# Altium PCB correctCore.PcbDoc (part 2 of 2)
Units mil, origin at the board's own origin, x right, y up, seen from the top; angles counter-clockwise.
Board outline 4175 x 4095 mil, 4 copper layers (Top Layer, GND, PWR, Bottom Layer), stack 43.711 mil thick; 90 components, 157 nets, 637 pads, 408 vias.
Unrouted connection lines stored in the file: 2.
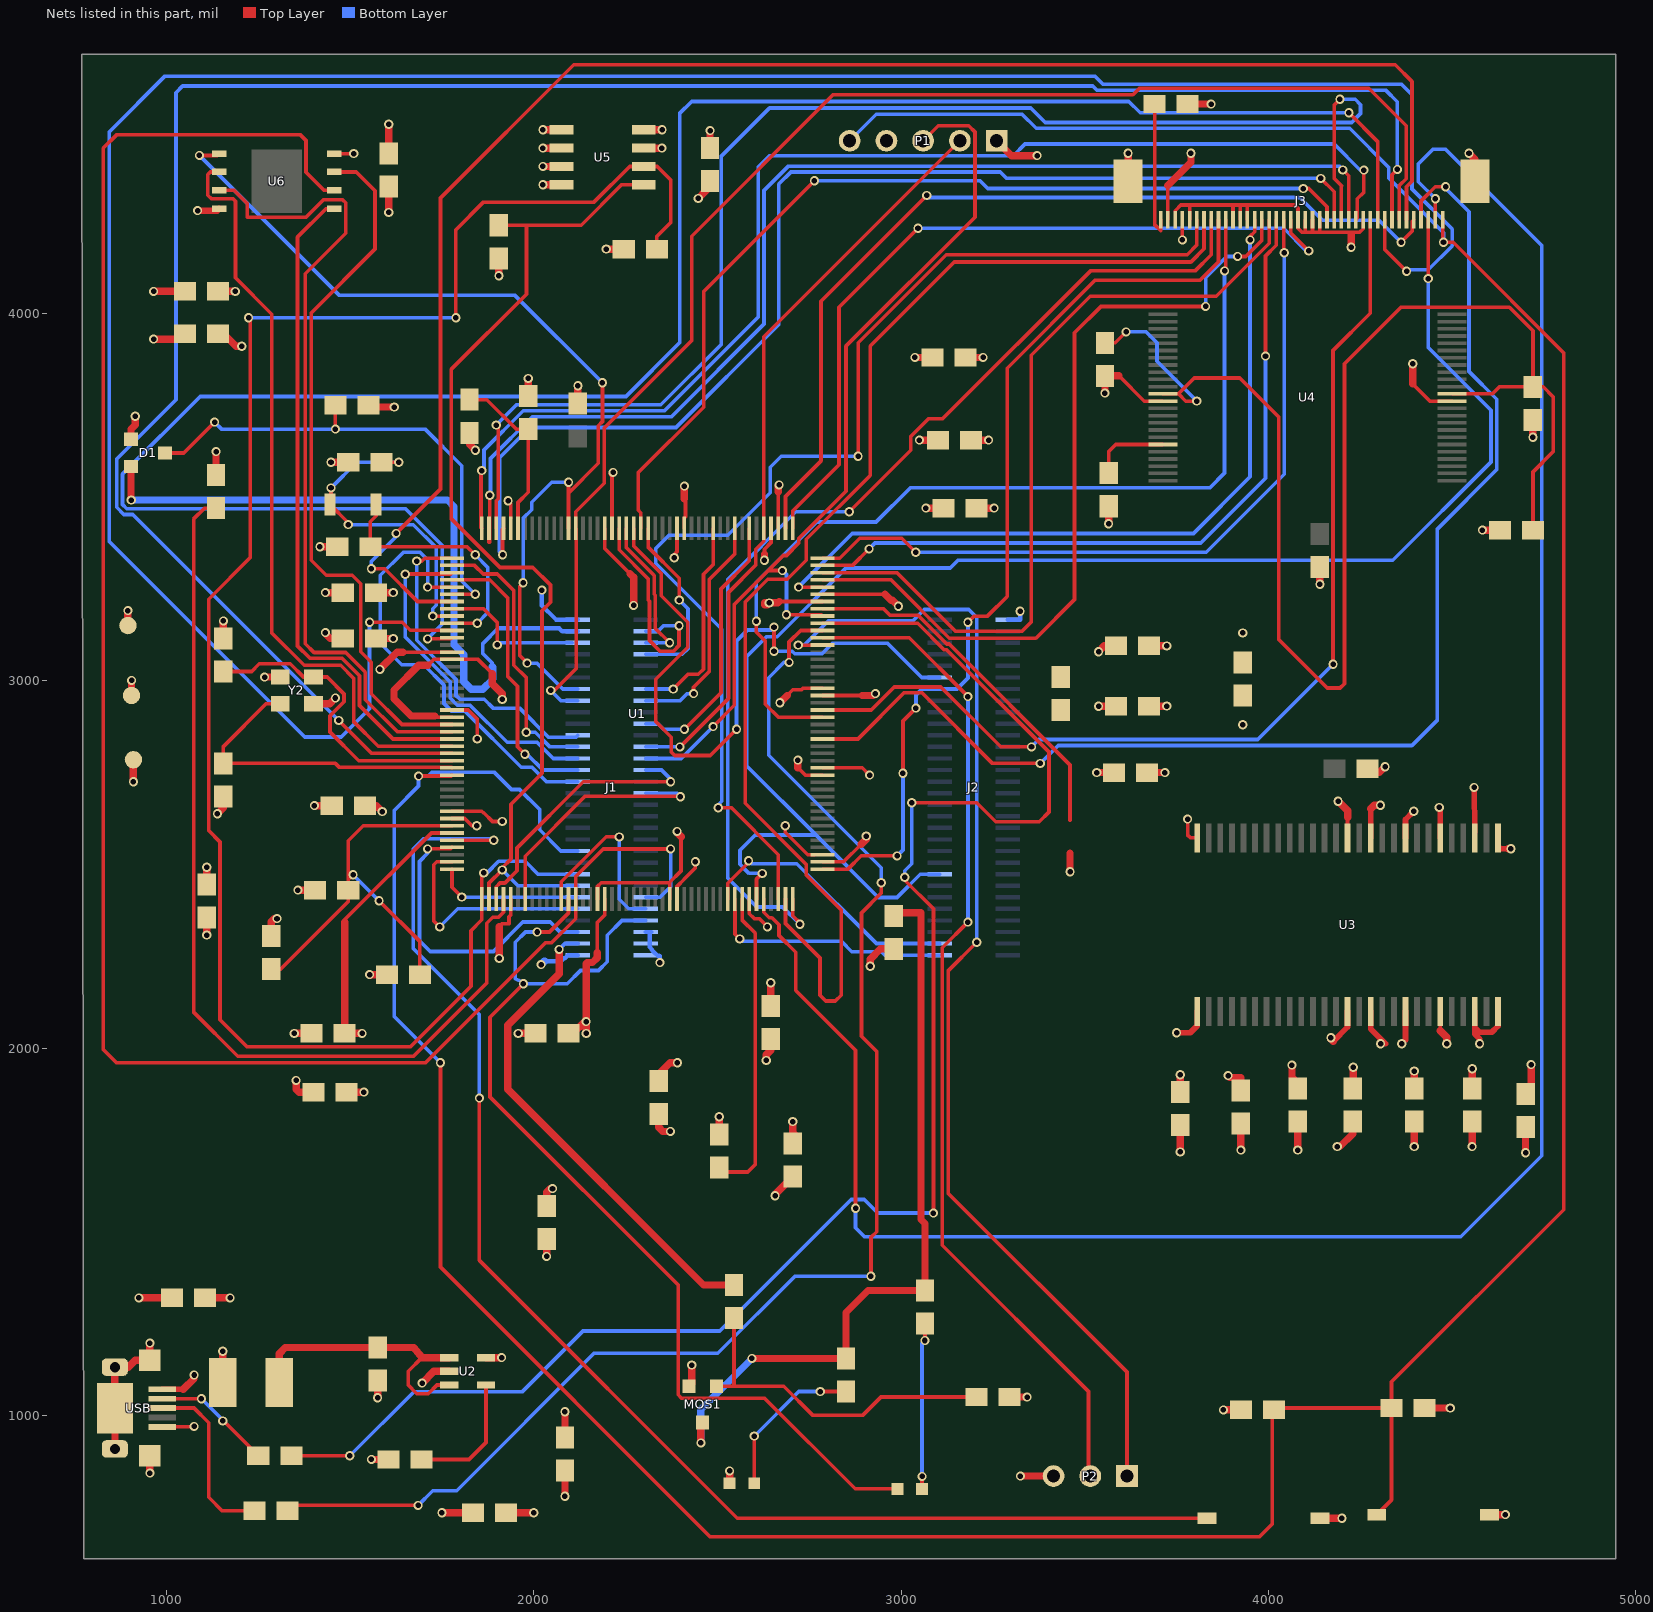
[diagram p4: the nets of this part, all layers, seen from the top]

## Via types
v1: diameter 25, hole 15, Top Layer to Bottom Layer, tented both sides, 408 vias

## Nets (pads, with @x,y where several pads share a name; then routed paths per layer and width w, separated by ;. In a path a pad name is that pad's centre, name@x,y a point inside that pad or via, vN(x,y) a via of type N, cw(c..) or ccw(c..) an arc to the next point about the centre after c; other vN are vias at no path point) (continued)
GND: C1.2 C2.1 C3.2 C4.1 C5.2 C6.1 C7.1 C8.1 C9.1 C10.1 C11.1 C12.2 C13.1 C14.1 C15.1 C16.1 C17.1 C18.1 C19.1 C20.1 C21.1 C22.1 C23.1 C24.1 C25.1 C26.1 C27.1 C28.1 C29.1 C30.1 C31.1 C32.1 C33.2 C34.2 C35.1 C36.1 C37.1 C38.1 C39.1 C40.1 C41.1 C42.1 C43.1 C44.2 C45.2 GND.1 J1.1 J1.30 J2.31 J3.3 J3.4 J3.5 J3.11 J3.12 J3.13 J3.20 J3.21 J3.22 J3.23 J3.29 J3.A J3.B P1.1 P2.3 PWR.2 R1.2 R4.2 R7.2 R14.1 RST.2 U1.14 U1.22 U1.37 U1.61 U1.71 U1.90 U1.102 U1.113 U1.126 U1.135 U1.148 U1.158 U2.2 U3.6 U3.12 U3.28 U3.41 U3.46 U3.52 U3.54 U4.13 U4.36 U5.1 U5.2 U5.3 U5.4 U5.7 U6.4 USB.5 USB.6 USB.7 USB.8 USB.9 Y2.2 Y2.4 | length 8486.9
  Top Layer w9.84: 3593.26,3830 3662,3761.26 U4.13@3712.6,3761.26 ; 3745.98,4279.76 3761.22,4295 3903.46,4295 ; v1(3765.67,4200) J3.4@3765.67,4232 ; J3.5@3785.35,4255 3785.35,4295 ; J3.11@3903.46,4255 3903.46,4295 ; J3.12@3923.15,4255 3923.15,4295 ; J3.13@3942.83,4255 3942.83,4295 ; J3.21@4100.32,4255 4100.32,4220.46 ; J3.22@4120,4255 4120,4220.46 ; J3.23@4139.69,4255 4139.69,4220.46 ; J3.29@4257.8,4255 4257.8,4230.7 4247.56,4220.46 4139.69,4220.46 ; 4393,3808 4439.74,3761.26 U4.36@4500,3761.26 ; 3903.46,4295 3923.15,4295 ; 3923.15,4295 3942.83,4295 ; 3942.83,4295 4072,4295 4080.63,4286.37 J3.20@4080.63,4255 4080.63,4231.99 4092.16,4220.46 4100.32,4220.46 ; 4100.32,4220.46 4120,4220.46 ; 4120,4220.46 4139.69,4220.46
  Top Layer w10: USB.5@989,968.82 v1@1074.01,968.82 ; 1643.78,3077.78 U1.14@1777.18,3077.78 ; U1.37@1777.18,2625.02 1811.98,2625.02 1831.66,2605.34 v1(1845,2605.34) ; U1.22@1777.18,2920.3 1821.74,2920.3 1846,2896.03 v1(1846,2841.56) ; U1.61@2173.46,2405.91 2173.46,2440 2183.46,2450 2369,2450 2401,2482 2401,2575 ; U1.158@2212.83,3415 v1@2212.83,3563.83 ; U1.71@2370.31,2405.91 2370.31,2450 ; U1.148@2409.68,3415 2409.68,3443 2413,3446.32 2413,3490 ; U1.135@2665.59,3415 2665.59,3514.59 ; 2668.04,3215.57 U1.126@2786.28,3215.57 ; 2719,2763 2738.87,2743.13 U1.102@2786.28,2743.13 ; U1.90@2786.28,2506.91 2843.16,2506.91 2891.25,2555 ; U1.113@2786.28,2959.67 2894.67,2959.67
  Top Layer w15.75: v1(3750,2041.62) 3787,2041.62 3806.02,2060.64 U3.28@3806.02,2100 ; v1@4176.87,2018.87 4215.47,2057.47 U3.41@4215.47,2100 ; U3.12@4278.46,2572.44 4278.46,2651.46 ; v1(4363,2012) 4372.95,2021.95 U3.46@4372.95,2100 ; v1(4465,2655) 4467.44,2652.56 U3.6@4467.44,2572.44 ; U3.52@4561.93,2100 4561.93,2056 ; v1(4575,2012) 4575,2024.93 4561.93,2038 4561.93,2056 ; U3.54@4624.92,2100 4624.92,2059.92 4608,2043 4574.93,2043 4561.93,2056
  Top Layer w17.72: v1(1085,4280) 1138.5,4280 U6.4@1143.5,4285
  Top Layer w20: USB.7@859.65,908.78 860,908.78 USB.9@860,1020 860,1085 859.65,1085.35 USB.6@859.65,1131.22 896,1131.22 914.78,1150 USB.9@955,1150 v1(955,1197) ; GND.1@905,2960 v1(905,3001) ; v1(925,1320) C33.2@1015,1320 ; v1(955,843) USB.8@955,890 ; v1@1074.01,968.82 v1(1075.19,970) ; R1.2@1135,3560 v1(1135,3624) ; v1(1139,2638) 1155.06,2654.06 C10.1@1155.06,2685 ; C11.1@1155,3115 v1(1155,3163) ; v1(1267,3010) Y2.4@1310,3010 ; v1(1348,2040) C7.1@1395,2040 ; v1(1353,1912) 1353,1888 1361,1880 C6.1@1400,1880 ; v1(1358,2430) C2.1@1405,2430 ; Y2.2@1400.55,2937.17 1444.17,2937.17 v1(1460,2953) ; v1(1403,2660) C15.1@1450,2660 ; v1(1418,3365) C9.1@1465,3365 ; v1(1433,3131) 1433,3128 1446.06,3114.94 C14.1@1480,3114.94 ; v1(1433,3240) C13.1@1480,3240 ; v1(1448,3595) C8.1@1495,3595 ; C1.2@1550,3750 1555,3745 v1(1620,3745) ; v1(1553,2200) C4.1@1600,2200 ; v1(1558,880) C30.1@1605,880 ; v1(1575,1048) C29.1@1575,1095 ; v1(1581,3031) 1627.78,3077.78 1643.78,3077.78 ; v1(1605,4275) C44.2@1605,4345 ; v1(1696,1088) 1728,1120 U2.2@1770,1120 ; v1@1753,735 C31.1@1815,735 ; v1(1958,2040) 2005,2040 C16.1@2005,2039.94 ; R4.2@1985,3775 v1(1985,3823) ; v1(2025,4350) U5.4@2075,4350 ; v1(2025,4400) U5.3@2075,4400 ; v1(2025,4450) U5.2@2075,4450 ; v1(2025,4500) U5.1@2075,4500 ; v1(2035,1433) C27.1@2035,1480 ; C32.1@2085,940 v1(2085,1010) ; R7.2@2120,3755 v1(2120,3803) ; v1@2212.83,3563.83 v1(2216,3567) ; U5.7@2299.41,4450 v1(2349,4450) ; C17.1@2340,1820 2340,1784 2351,1773 v1(2372,1773) ; v1(2390,2590) 2390,2586.57 2401.57,2575 ; 2410,3495.73 v1(2410,3530) ; v1(2448,4313) 2470,4335 2470,4360 C45.2@2479.94,4360 ; C3.2@2505,1765 v1(2505,1813) ; v1(2533,849) 2533.07,848.93 PWR.2@2533.07,815 ; v1(2633,1966.5) 2633,1982 2645,1994 C18.1@2645,2025 ; v1(2657,1598) 2657,1602 C19.1@2705,1650 ; 2665.59,3514.59 2665.59,3530.59 v1(2668,3533) ; 2668.04,3215.57 2664.46,3212 v1(2641,3212) ; 2719,2763 v1(2719,2784) ; 2891.25,2555 2905,2568.75 v1(2905,2577.2) ; 2894.67,2959.67 2924.67,2959.67 v1(2930,2965) ; v1(2916,2223) 2916,2242 2944,2270 C34.2@2980,2270 ; C25.1@3175,3880.06 3222.94,3880.06 v1(3223,3880) ; C24.1@3190,3655 v1(3238,3655) ; C23.1@3205,3470 v1(3253,3470) ; P1.1@3260,4470 3300.53,4429.47 v1(3370,4429.47) ; R14.1@3295,1050 v1(3343,1050) ; v1(3325,835) P2.3@3415,835 ; v1(3460,2480) 3460,2530 ; v1(3555,3783) C36.1@3555,3830 3593.26,3830 ; J3.A@3618.03,4359.43 v1(3618,4436) ; C21.1@3670,2750 v1(3718,2750) ; C20.1@3675,2930.58 3722.58,2930.58 v1(3723,2931) ; C22.1@3675,3095 v1(3723,3095) ; v1(3760,1717.11) 3760,1790 C37.1@3760.06,1790 ; C28.1@3780,4570.06 3827.94,4570.06 3828,4570 v1(3844,4570) ; v1(3925,1722.5) C38.1@3925,1795 ; v1(4080,1722.5) C39.1@4080,1800 ; v1(4170,2028) 4170,2025.75 v1@4176.87,2018.87 ; v1(4187.19,1731.88) 4194.88,1731.88 4230,1767 C40.1@4230,1800 ; v1(4225,4180) 4225,4215.38 ; 4278.46,2651.46 4288,2661 v1(4305,2661) ; 4393,3808 v1(4393,3863) ; v1(4396.97,1731.88) C41.1@4396.97,1800 ; C12.2@4425,1020 v1(4495,1020) ; v1(4546,4436) 4561.91,4420.09 J3.B@4561.91,4359.43 ; v1(4554.45,1731.88) 4554.45,1799.55 4554,1800 C42.1@4554.45,1800 ; RST.2@4602.09,730 v1(4645,730) ; v1(4700,1715) C43.1@4700,1785 ; v1(4720,3663) C35.1@4720,3710 ; v1(2641,3212) 2628.64,3212 2628.64,3206.5 2635.5,3206.5 v1(2641,3212)
  Bottom Layer w11.81: v1(2022,3247) 2022,3205 2060.61,3166.39 J1.30@2119.96,3166.39 ; 2030,2236.09 2073.68,2236.09 2081.68,2244.09 2084.5,2244.09 2093.41,2253 J1.1@2119.96,2253 ; J2.31@3290,3166.39 3324,3166.39 v1(3324,3189)
  Bottom Layer w20: v1(2020,2227.19) 2028.9,2236.09 2030,2236.09
  other v1: 1750,735 3930,2880
IIC_SCL: J1.8 R20.1 U1.45 U5.6 | length 5040.8
  Top Layer w10: v1(1223.5,3988) 1228.5,3983 1228.5,3335.5 1115,3222 1115,2592 1146,2561 1146,2077 1219,2004 1665,2004 1829,2168 1829,2319.5 1858.5,2349 U1.45@1858.5,2405.91 1858.5,2471.37 v1(1864.06,2476.92) ; v1(1788,3988) 1788,4228 1863,4303 2164,4303 2261,4400 U5.6@2299.41,4400 2336,4400 2373,4363 2373,4247.37 2335,4209.37 R20.1@2335,4175.06
  Bottom Layer w10: v1(1223.5,3988) v1(1788,3988) ; v1(1864.06,2476.92) 1872.69,2476.92 1904.27,2508.5 1976.5,2508.5 2011.53,2473.47 J1.8@2119.96,2473.47
IIC_SDA: J1.7 R21.1 U1.46 U5.5 | length 2816.5
  Top Layer w10: U1.46@1878.19,2405.91 1878.19,2449.19 v1(1914,2485) 1914,2491 1938,2515 1938,2664 2022.5,2748.5 2022.5,3190.5 2045.5,3213.5 2045.5,3260.5 1997.5,3308.5 1908.23,3308.5 1775,3441.73 1775,3847 1980,4052 1980,4240 ; R21.1@1904.94,4240 1980,4240 ; U5.5@2299.41,4350 2239,4350 2129,4240 1980,4240
  Bottom Layer w10: v1(1914,2485) 1957.02,2441.98 J1.7@2119.96,2441.98
JTCK: J1.42 P1.2 U1.137 | length 2058.7
  Top Layer w10: v1(2398,2819.93) 2530,2951.93 2530,3240.42 2604.5,3314.92 2604.5,3357.72 2626.22,3379.44 U1.137@2626.22,3415 2626.22,3936.22 P1.2@3160,4470
  Bottom Layer w10: J1.42@2305,2819.93 v1(2398,2819.93)
JTMS: J1.43 P1.3 U1.124 | length 2566.6
  Top Layer w10: v1(2488,2875) 2546,2933 2546,3207.63 2638.37,3300 ; v1(2677,3300) 2638.37,3300 ; v1(2687.93,3179.5) 2782.98,3179.5 U1.124@2786.28,3176.2 ; P1.3@3060,4470 3101,4511 3184,4511 3201,4494 3201,4262 2850,3911 2850,3515.63 2721,3386.63 2721,3374 2688,3341 2679.37,3341 2638.37,3300
  Bottom Layer w10: J1.43@2305,2788.43 2401.43,2788.43 v1(2488,2875) ; v1(2677,3300) 2687.93,3289.07 v1(2687.93,3179.5)
KEY0: J1.6 U1.44 | length 403.5
  Top Layer w10: U1.44@1777.18,2487.23 1777.18,2437.82 v1(1804,2411)
  Bottom Layer w10: v1(1804,2411) 1819.48,2411 1820,2410.48 J1.6@2119.96,2410.48
KEY1: J1.5 U1.43 | length 624.3
  Top Layer w10: v1(1744,2330) 1728,2346 1728,2498.91 1736,2506.91 U1.43@1777.18,2506.91
  Bottom Layer w10: v1(1744,2330) 1792.98,2378.98 J1.5@2119.96,2378.98
KEY2: J1.28 U1.8 | length 406.4
  Top Layer w10: U1.8@1777.18,3195.89 1863.21,3195.89 1900.41,3158.69 v1(1900.41,3097.46)
  Bottom Layer w10: v1(1900.41,3097.46) 1906.35,3103.4 J1.28@2104.54,3103.4
LCD_B3: J3.24 U1.154 | length 2607.6
  Top Layer w9.84: v1(4095,4340) 4109.87,4340 4159.37,4290.5 J3.24@4159.37,4255
  Top Layer w10: U1.154@2291.57,3415 2291.57,3457.43 2284.5,3464.5 2284.5,3566.84 2462.5,3744.84 2462.5,4059.5 v1(2764,4361)
  Bottom Layer w10: v1(2764,4361) 3215,4361 3236,4340 v1(4095,4340)
LCD_B4: J3.25 U1.173 | length 3257.7
  Top Layer w9.84: J3.25@4179.06,4255 4179.06,4331
  Top Layer w10: v1(1915,3343) 1915,3412.44 U1.173@1917.56,3415 ; v1(4142.56,4367.5) 4179.06,4331
  Bottom Layer w10: v1(1915,3343) 1906.5,3351.5 1906.5,3606.74 1989.32,3689.55 2387.11,3689.55 2667,3969.45 2667,4352 2700,4385 3270,4385 3287.5,4367.5 v1(4142.56,4367.5)
LCD_B5: J3.26 U1.174 | length 3751.2
  Top Layer w9.84: J3.26@4198.74,4255 4198.74,4347.34
  Top Layer w10: U1.174@1897.87,3415 1897.87,3489.64 1903.5,3495.27 1903.5,3690.5 v1(1898,3696) ; v1(4194.71,4583) 4178.93,4567.21 4178.93,4367.15 4198.74,4347.34
  Bottom Layer w10: v1(1898,3696) 1953,3751 2346,3751 2510,3915 2510,4427 2642,4559 3353,4559 3392.25,4519.75 4226.5,4519.75 4250.75,4544 4250.75,4568.25 4236,4583 v1(4194.71,4583)
LCD_B6: J3.27 U1.175 | length 3277.2
  Top Layer w9.84: J3.27@4218.43,4255 4218.43,4374.57
  Top Layer w10: U1.175@1878.19,3415 1878.19,3377.52 1880,3377.52 v1(1880,3505) ; v1(4202.43,4390.57) 4218.43,4374.57
  Bottom Layer w10: v1(1880,3505) 1882,3507 1882,3604.87 1996.13,3719 2375,3719 2627,3971 2627,4334.63 2693.37,4401 4192,4401 v1(4202.43,4390.57)
LCD_B7: J3.28 U1.176 | length 3370.8
  Top Layer w9.84: J3.28@4238.11,4255 4241.95,4258.84 4241.95,4311.95 4260,4330 v1(4260,4390)
  Top Layer w10: U1.176@1858.5,3415 1856.5,3417 1856.5,3570 v1(1858.5,3572)
  Bottom Layer w10: v1(1858.5,3572) 1864.5,3578 1864.5,3628.47 1971.03,3735 2355.69,3735 2611,3990.31 2611,4399 2641.47,4429.47 3305.47,4429.47 3337,4461 4179,4461 4250,4390 v1(4260,4390)
LCD_BL: J1.23 J3.34 U1.163 | length 3905.6
  Top Layer w9.84: J3.34@4356.22,4255 4356.22,4347.94
  Top Layer w10: v1(2046,2973.5) 2055.72,2973.5 2115.39,3033.17 2115.39,3414.02 U1.163@2114.41,3415 2114.41,3460 2191.83,3537.43 2191.83,3687.83 2430,3926 2430,4210.37 2814.63,4595 3631,4595 3649,4613 4273,4613 4375,4511 4375,4366.72 4356.22,4347.94
  Bottom Layer w10: v1(2046,2973.5) 2073.58,2945.92 2073.73,2945.92 J1.23@2119.96,2945.91
LCD_CLK: J3.30 U1.111 | length 2828.4
  Top Layer w9.84: 4277.48,4000.48 J3.30@4277.48,4255
  Top Layer w10: U1.111@2786.28,2920.3 2918.53,2920.3 2981.23,2983 3108,2983 3271,2820 v1(3355,2820) ; v1(4176,3045) 4176,3899 4277.48,4000.48
  Bottom Layer w10: v1(3355,2820) 3375,2840 3971,2840 v1(4176,3045)
LCD_DE: J3.33 U1.28 | length 6063.3
  Top Layer w9.84: J3.33@4336.54,4255 4336.54,4377.36
  Top Layer w10: v1(1469,2892) 1558.81,2802.19 U1.28@1777.18,2802.19 ; 4336.54,4377.36 v1(4351,4391.82)
  Bottom Layer w10: v1(1469,2892) 908.5,3452.5 884,3452.5 864.5,3472 864.5,3603.5 1026,3765 1026,4601 1044,4619 3522.01,4619 3533.92,4607.09 4319.91,4607.09 4351,4576 v1(4351,4391.82)
LCD_G2: J3.14 U1.128 | length 2123.7
  Top Layer w9.84: v1(3950,4200) 3950,4209.48 3962.52,4222 J3.14@3962.52,4255
  Top Layer w10: v1(2721,3254.94) U1.128@2786.28,3254.94
  Bottom Layer w10: v1(2721,3254.94) 2867,3400.94 3795.81,3400.94 3950,3555.14 v1(3950,4200)
LCD_G3: J3.15 U1.129 | length 2237.4
  Top Layer w9.84: 3982.2,4208.45 J3.15@3982.2,4255
  Top Layer w10: U1.129@2786.28,3274.63 2972.37,3274.63 3131,3116 3367,3116 3472,3221 3472,3947 3544,4019 v1(3829,4019) ; v1(3916,4155) 3938.23,4155 3982.2,4198.97 3982.2,4208.45
  Bottom Layer w10: v1(3829,4019) 3829,4097.38 3886.62,4155 v1(3916,4155)
LCD_G4: J3.16 U1.130 | length 2208.3
  Top Layer w9.84: 4001.89,4191 J3.16@4001.89,4255
  Top Layer w10: U1.130@2786.28,3294.31 2989,3294.31 3148.31,3135 3329,3135 3354,3160 3354,3886 3515,4047 3857.89,4047 4001.89,4191
LCD_G5: J3.17 U1.131 | length 2019.9
  Top Layer w9.84: 4021.57,4185.72 J3.17@4021.57,4255
  Top Layer w10: U1.131@2786.28,3314 2868,3314 v1(2913,3359) ; v1(3992,3884) 3992,4156.14 4021.57,4185.72
  Bottom Layer w10: v1(2913,3359) 2929,3375 3815.56,3375 3992,3551.44 v1(3992,3884)
LCD_G6: J3.18 U1.132 | length 2076.5
  Top Layer w9.84: v1@4041.26,4166.74 J3.18@4041.26,4255
  Top Layer w10: U1.132@2786.28,3333.68 2833,3333.68 2887.32,3388 3002,3388 v1(3040,3350) ; v1@4041.26,4166.74 v1(4043,4165)
  Bottom Layer w10: v1(3040,3350) 3831,3350 4043,3562 v1(4043,4165)
LCD_G7: J3.19 U1.133 | length 2152.9
  Top Layer w9.84: J3.19@4060.94,4255 4060.94,4219.06 v1(4109.87,4170.13)
  Top Layer w10: U1.133@2704.96,3415 2704.96,3462.01 2831,3588.05 2831,4017 v1(3046,4232)
  Bottom Layer w10: v1(3046,4232) 4041.42,4232 4103.3,4170.13 v1(4109.87,4170.13)
LCD_HSYNC: J3.31 U1.12 | length 5797.9
  Top Layer w9.84: J3.31@4297.17,4255 4297.17,4467.83
  Top Layer w10: v1(1711,3114) 1774.04,3114 U1.12@1777.18,3117.15 ; v1(4219,4546) 4297.17,4467.83
  Bottom Layer w10: v1(1711,3114) 1750.5,3153.5 1750.5,3369.13 1651.13,3468.5 892,3468.5 880.5,3480 880.5,3562.5 1092,3774 2251,3774 2397,3920 2397,4544 2430,4577 3620,4577 3651,4546 v1(4219,4546)
LCD_R3: J3.6 U1.86 | length 3226.8
  Top Layer w9.84: 3123,4160 3778.86,4160 3805.04,4186.18 J3.6@3805.04,4255
  Top Layer w10: v1(2502,2654) 2538.11,2654 2665.59,2526.52 U1.86@2665.59,2405.91 ; v1(2883,3611) 2883,3920 3123,4160
  Bottom Layer w10: v1(2502,2654) 2502,2662.45 2511.57,2672.02 2511.57,3140.43 2332,3320 2332,3360 2368,3396 2528,3396 2644,3512 2644,3581 2674,3611 v1(2883,3611)
LCD_R4: J3.7 U1.87 | length 3517
  Top Layer w9.84: 3824.72,4175.83 J3.7@3824.72,4255
  Top Layer w10: U1.87@2685.27,2405.91 2685.27,2339 2779,2245.27 2779,2144 2795,2128 2821,2128 2837,2144 2837,2376 2742,2471 2742,2500 2575.5,2666.5 2575.5,3214.5 2637.14,3276.14 2690.14,3276.14 2742,3328 2742,3385 2916,3559 2916,3911 3145,4140 3788.9,4140 3824.72,4175.83
LCD_R5: J3.8 U1.88 | length 2937.5
  Top Layer w9.84: 3844.41,4159.69 J3.8@3844.41,4255
  Top Layer w10: U1.88@2704.96,2405.91 2704.96,2360 2724.5,2340.46 v1(2724.5,2336.96) ; v1(2859,3460) 3026.5,3627.5 3026.5,3664.73 3074.77,3713 3113,3713 3515.69,4115.69 3800.41,4115.69 3844.41,4159.69
  Bottom Layer w10: v1(2724.5,2336.96) 2677.46,2384 2606.74,2384 2528.5,2462.24 2528.5,3275.5 2713,3460 v1(2859,3460)
LCD_R6: J2.24 J3.9 U1.89 | length 2556.4
  Top Layer w9.84: 3864.09,4140.42 J3.9@3864.09,4255
  Top Layer w10: U1.89@2786.28,2487.23 2855.25,2487.23 2891.25,2523.23 v1(2989,2523.23) ; v1(3005,2748) 3005,2890.28 v1(3040.41,2925.69) ; v1(3182,3159) 3199,3176 3235.43,3176 3289,3229.57 3289,3851 3528,4090 3813.68,4090 3864.09,4140.42
  Bottom Layer w10: v1(2989,2523.23) 3005,2539.23 v1(3005,2748) ; v1(3040.41,2925.69) 3040.41,2961.09 3056.72,2977.41 J2.24@3104.96,2977.41 3152,2977.41 3182,3007.41 v1(3182,3159)
LCD_R7: J3.10 U1.110 | length 2601
  Top Layer w9.84: 3883.78,4147.22 J3.10@3883.78,4255
  Top Layer w10: v1(2606,3162) 2606,3132.5 2630.5,3108 2630.5,2936.11 2666,2900.61 U1.110@2786.28,2900.61 ; v1(3880.55,4115.69) 3883.78,4118.92 3883.78,4147.22
  Bottom Layer w10: v1(2606,3162) 2606,3267.78 2770.22,3432 2932,3432 3025,3525 3840,3525 3880.55,3565.55 v1(3880.55,4115.69)
LCD_VSYNC: J3.32 U1.11 | length 6949.5
  Top Layer w9.84: J3.32@4316.85,4255 4316.85,4174.06 v1(4375.91,4115)
  Top Layer w10: v1(1553,3159) 1642,3159 1663.5,3137.5 1776.52,3137.5 U1.11@1777.18,3136.83
  Bottom Layer w10: v1(1553,3159) 1553,2924 1475.63,2846.63 1376.37,2846.63 844,3379 844,4494 996,4646 3527,4646 3549.5,4623.5 4362.5,4623.5 4391,4595 4391,4338.56 4500.07,4229.49 4500.07,4183.76 4434.81,4118.5 4379.41,4118.5 v1(4375.91,4115)
LED0: DS0.2 J1.57 U1.57 | length 2866.1
  Top Layer w10: v1(1972,2175) 1881,2084 1881,1867 2393,1355 2393,1056 2402,1047 2628,1047 2875,800 DS0.2@2990,800 ; v1(2009,2316) 2042.72,2316 2094.72,2368 U1.57@2094.72,2405.91
  Bottom Layer w10: v1(1972,2175) v1@1978.2,2175 ; v1(2009,2316) 1977.5,2316 1949.5,2288 1949.5,2188.7 1973.15,2177.41 v1@1978.2,2175 ; J1.57@2305,2347.49 2240,2347.49 2200,2307.49 2200,2235 2176,2211 2127,2211 2091,2175 v1@1978.2,2175
LED1: J1.56 U1.56 | length 508.4
  Top Layer w10: U1.56@2075.04,2405.91 2075.04,2453.04 2197,2575 v1(2232.52,2575)
  Bottom Layer w10: v1(2232.52,2575) 2232.52,2405.03 2258.56,2378.98 J1.56@2305,2378.98
NetC1_1: C1.1 D1.3 U1.6 | length 1385
  Top Layer w10: D1.3@996.26,3620 1047,3620 v1(1131,3704) ; v1(1460,3685) C1.1@1460,3750 ; U1.6@1777.18,3235.26 v1(1840.5,3235.26)
  Bottom Layer w10: v1(1131,3704) 1150,3685 v1(1460,3685) 1704,3685 1804,3585 1804,3271.76 v1(1840.5,3235.26)
NetC2_2: C2.2 C4.2 R2.1 U1.38 | length 1116.5
  Top Layer w10: R2.1@1285,2215 1311,2215 1495,2399 C2.2@1495,2430 1495,2459 ; v1(1508,2472) 1495,2459 ; v1(1579,2401) 1690,2290 C4.2@1690,2200 ; U1.38@1777.18,2605.34 1536,2605.34 1495,2564.34 1495,2459
  Bottom Layer w10: v1(1508,2472) v1(1579,2401)
NetC3_1: C3.1 U1.81 | length 824.2
  Top Layer w10: C3.1@2525,1662.5 2582.5,1662.5 2602.98,1682.98 2602.98,2313 2567.16,2348.82 U1.81@2567.16,2405.91
NetC5_1: C5.1 U1.125 | length 1000.6
  Top Layer w10: U1.125@2786.28,3195.89 2951.93,3195.89 2969.11,3178.7 3045.67,3178.7 3124.37,3100 3130.86,3100 3460,2770.86 3460,2620
NetC8_2: C8.2 U1.9 Y1.1 | length 891
  Top Layer w10: v1(1448,3525) 1448,3483 Y1.1@1445,3480 1495,3430 v1(1495,3425) ; C8.2@1585,3595 v1(1632.5,3595) ; v1(1725,3176) 1776.98,3176 U1.9@1777.18,3176.2
  Bottom Layer w10: v1(1448,3525) 1518,3595 v1(1632.5,3595) ; v1(1495,3425) 1672,3425 1734.5,3362.5 1734.5,3205.77 1725,3196.27 v1(1725,3176)
NetC9_2: C9.2 U1.10 Y1.2 | length 699.5
  Top Layer w10: Y1.2@1570.98,3480 1570.98,3449 1555,3433.02 C9.2@1555,3365 1818.5,3365 v1(1840.5,3343) ; U1.10@1777.18,3156.52 v1@1847.83,3156.52
  Bottom Layer w10: v1(1840.5,3343) 1875,3308.5 1875,3185.69 v1(1846,3156.69)
NetC10_2: C10.2 U1.30 Y2.1 | length 876.2
  Top Layer w10: Y2.1@1310,2937.17 1271.23,2937.17 1155.06,2821 C10.2@1155.06,2775 1460,2775 1470.93,2764.07 1775.93,2764.07 U1.30@1777.18,2762.82
NetC11_2: C11.2 U1.29 Y2.3 | length 854.5
  Top Layer w10: C11.2@1155,3025 1232,3025 1253,3046 1337,3046 1373,3010 Y2.3@1400.55,3010 1437.51,3010 1483.5,2964.01 1483.5,2943 1445.5,2905 1445.5,2860.38 1523.38,2782.5 U1.29@1777.18,2782.5
NetC28_2: C28.2 J3.1 | length 381
  Top Layer w9.84: C28.2@3690,4570.06 3690,4242.07 3706.61,4225.46 J3.1@3706.61,4255
NetC29_2: C29.2 F1.2 U2.1 U2.3 | length 782.8
  Top Layer w10: 1695.68,1157.4 1658.28,1120 1658.28,1082.6 1681.78,1059.1 1713.01,1059.1 1736.51,1082.6 U2.3@1770,1082.6
  Top Layer w20: F1.2@1306.77,1090 1306.77,1168 1323.77,1185 C29.2@1575,1185 1673,1185 1695.68,1157.4 U2.1@1770,1157.4
NetC30_2: C30.2 U2.4 | length 350.7
  Top Layer w10: C30.2@1695,880 1824,880 1870,926 U2.4@1870,1082.6
NetC35_2: C35.2 C36.2 R16.1 U4.12 U4.37 | length 3957
  Top Layer w9: U4.37@4500,3780.95 4610,3780.95
  Top Layer w9.84: U4.12@3712.6,3780.95 3754.95,3780.95 ; 3798,3824 3754.95,3780.95 ; v1(3805,3761.26) 3774.63,3761.26 3754.95,3780.95
  Top Layer w10: C36.2@3555,3920 3582.8,3920 v1(3612.6,3949.8) ; 3798,3824 3922,3824 4028,3718 4028,3112 4160,2980 4195,2980 4207,2992 4207,3863 4361,4017 4656,4017 4720,3953 C35.2@4720,3800 ; 4610,3780.95 4629.05,3800 C35.2@4720,3800 ; R16.1@4720,3410 4720,3568.28 4775,3623.28 4775,3773 4748,3800 C35.2@4720,3800
  Bottom Layer w10: v1(3612.6,3949.8) 3666.59,3949.8 3696.53,3919.86 3696.53,3869.73 v1(3805,3761.26)
NetDS0_1: DS0.1 R10.2 | length 453.3
  Top Layer w10: DS0.1@3056.93,800 3056.93,833.93 v1(3057,834) ; v1(3064.94,1203.94) R10.2@3064.94,1250
  Bottom Layer w10: v1(3057,834) 3057,1196 v1(3064.94,1203.94)
NetMOS1_1: MOS1.1 R13.2 R14.2 | length 946.9
  Top Layer w10: MOS1.1@2497.4,1079.21 2545,1079.21 ; R13.2@2545,1265 2545,1079.21 ; R14.2@3205,1050 2945,1050 2895,1000 2760,1000 2680.79,1079.21 2545,1079.21
NetPWR_1: PWR.1 R15.1 | length 428.9
  Top Layer w10: PWR.1@2600,815 v1(2600,943.54) ; v1(2780,1065) R15.1@2850,1065
  Bottom Layer w10: v1(2600,943.54) 2721.46,1065 v1(2780,1065)
NetR1_1: R1.1 U1.48 | length 2602.4
  Top Layer w10: R1.1@1135,3470 1104,3470 1074,3440 1074,2098.44 1194.44,1978 1672.87,1978 1872,2177.13 1872,2340 1888,2356 1904,2356 1917.56,2369.56 U1.48@1917.56,2405.91
NetR4_1: R4.1 R5.1 U1.171 | length 474.8
  Top Layer w10: R5.1@1825,3765 1872,3765 1952,3685 R4.1@1985,3685 1985,3513.39 1956.93,3485.31 U1.171@1956.93,3415
NetR11_2: R11.2 USB.3 | length 485.8
  Top Layer w10: USB.3@989,1020 1075,1020 1115,980 1115,777.06 1152,740.06 R11.2@1240,740.06
NetR12_2: R12.2 USB.2 | length 327.6
  Top Layer w10: USB.2@989,1045.59 v1(1095.41,1045.59) ; v1(1153.23,985) 1156,985 1250,891 R12.2@1250,890.06
  Bottom Layer w10: v1(1095.41,1045.59) 1153.23,987.77 v1(1153.23,985)
NetR18_1: R18.1 U4.19 | length 214.6
  Top Layer w9.84: 3584,3643.15 U4.19@3712.6,3643.15
  Top Layer w10: R18.1@3565,3565 3565,3624.15 3584,3643.15
NRF_CE: J2.25 U1.155 | length 1862.2
  Top Layer w10: U1.155@2271.89,3415 2271.89,3367 2347,3291.89 2347,3231.2 2418.98,3159.21 2418.98,3090.98 2332,3004 2332,2889 2374.5,2846.5 2374.5,2805.93 2384,2796.43 2480.43,2796.43 v1(2552,2868) ; v1(2654,3080.5) v1(2654,3146)
  Bottom Layer w10: v1(2552,2868) 2552,3108 2582,3138 2646,3138 v1(2654,3146) ; v1(2654,3080.5) 2703.27,3080.5 2710.27,3073.5 2784.5,3073.5 2813,3102 2962.9,3102 3056,3008.9 J2.25@3104.96,3008.9
NRF_CS: J1.34 U1.153 | length 493.9
  Top Layer w10: U1.153@2311.26,3415 2311.26,3363.89 2396,3279.15 v1(2396,3219.65)
  Bottom Layer w10: J1.34@2305,3071.9 2404.18,3071.9 2420,3087.72 2420,3195.65 v1(2396,3219.65)
PA0: U1.40 WKUP.1 | length 3812.2
  Top Layer w10: U1.40@1777.18,2565.97 v1(1891,2565.97) ; v1(1852,1864) 1852,1422 2554,720 WKUP.1@3832.91,720
  Bottom Layer w10: v1(1852,1864) 1852,2090.8 1672,2270.8 1672,2542 1699.78,2569.78 1887.19,2569.78 v1(1891,2565.97)
PA1: J1.3 U1.41 | length 814.6
  Top Layer w10: v1(1711,2542) 1711.6,2542.6 1773.5,2542.6 U1.41@1777.18,2546.28
  Bottom Layer w10: v1(1711,2542) 1711,2530.28 1688.75,2508.03 1688.75,2292.25 1718,2263 1890.2,2263 1970.2,2343 2044.6,2343 2071.61,2315.99 J1.3@2119.96,2315.99
PA3: J1.44 U1.47 | length 748
  Top Layer w10: U1.47@1897.87,2405.91 1897.87,2439.26 1908,2449.39 1921.41,2449.39 1954.5,2482.48 1954.5,2544.89 2134.55,2724.94 v1(2372.5,2724.94)
  Bottom Layer w10: J1.44@2305,2756.94 2348,2756.94 2372.5,2732.44 v1(2372.5,2724.94)
PA5: J1.46 U1.51 | length 706
  Top Layer w10: U1.51@1976.61,2405.91 1976.61,2522.25 2140.31,2685.95 2397.81,2685.95 v1(2399.4,2684.35)
  Bottom Layer w10: J1.46@2305,2693.95 2389.81,2693.95 v1(2399.4,2684.35)
PA9: P2.1 U1.120 | length 3172.8
  Top Layer w10: v1(2720,3097) 2785.82,3097 U1.120@2786.28,3097.46 ; v1(3206,2288) 3128,2210 3128,1605 3615,1118 P2.1@3615,835
  Bottom Layer w10: v1(2720,3097) 2736,3097 2802.5,3163.5 3032.24,3163.5 3062.74,3194 3184,3194 3206,3172 v1(3206,2288)
PA10: P2.2 U1.121 | length 2777.9
  Top Layer w10: U1.121@2786.28,3117.15 3021.85,3117.15 v1(3182,2957) ; v1(3182,2343) 3112,2273 3112,1463 3510,1065 P2.2@3510,835
  Bottom Layer w10: v1(3182,2343) v1(3182,2957)
PA11: R11.1 U1.122 | length 3917.1
  Top Layer w10: R11.1@1314.94,755 R11.1@1344.94,755 ; R11.1@1330,740.06 R11.1@1344.94,755 ; v1(1685,755) R11.1@1344.94,755 ; v1(2695,3050) 2695,3105.23 2726.6,3136.83 U1.122@2786.28,3136.83 ; v1(2918,1379) 2918,1484.77 2933.5,1500.27 2933.5,1990.5 2892,2032 2892,2368 2946,2422 v1(2946,2450)
  Bottom Layer w10: v1(1685,755) 1725,795 1790,795 2163.95,1168.95 2500.95,1168.95 2711,1379 v1(2918,1379) ; v1(2695,3050) 2681.29,3050 2639.68,3008.39 2639.68,2797.07 2946,2490.75 v1(2946,2450)
PA12: R12.1 U1.123 | length 4540.2
  Top Layer w10: R12.1@1340,890.06 v1(1499.06,890.06) ; U1.123@2786.28,3156.52 3045.23,3156.52 3117.75,3084 3124.23,3084 3402.5,2805.73 3402.5,2642.5 3376,2616 3258,2616 3206,2668 v1(3029,2668) ; v1(3010,2465) 3010,2457 3088,2379 v1(3088,1551)
  Bottom Layer w10: v1(1499.06,890.06) 1673,1064 1968.11,1064 2134.11,1230 2506.18,1230 2864,1587.82 2899.57,1587.82 2936.39,1551 v1(3088,1551) ; v1(3010,2465) 3010,2483 3029,2502 v1(3029,2668)
PB2: J1.55 U1.58 U6.6 | length 5260.6
  Top Layer w10: U6.6@1456.5,4335 1429,4335 1380,4384 1380,4471 1365,4486 864,4486 828,4450 828,1996 864,1960 1705.5,1960 2032,2286.5 2048.5,2286.5 2114.41,2352.41 U1.58@2114.41,2405.91 2114.41,2467 2189.41,2542 v1(2372.5,2542)
  Bottom Layer w10: J1.55@2305,2410.48 2343.56,2410.48 2372.5,2439.42 v1(2372.5,2542)
PB6: J1.24 U1.164 U6.1 | length 2622.6
  Top Layer w10: v1(1090,4430) 1138.5,4430 U6.1@1143.5,4435 ; v1(1971,3267) 1961.5,3257.5 1961.5,3068.5 v1(1982,3048) ; U1.164@2094.72,3415 2094.72,3510.72 ; v1(2094.72,3540.3) 2094.72,3510.72 ; v1(2187,3811) 2187,3705.63 2175.83,3694.46 2175.83,3591.83 2094.72,3510.72
  Bottom Layer w10: v1(1090,4430) 1471,4049 1949,4049 v1(2187,3811) ; v1(1971,3267) 1971,3442.13 1994.5,3465.63 1994.5,3485.65 2049.15,3540.3 v1(2094.72,3540.3) ; v1(1982,3048) 2008.04,3048 2078.63,2977.41 J1.24@2119.96,2977.41
PB10: J2.2 U1.79 | length 744.6
  Top Layer w10: U1.79@2527.79,2405.91 2527.79,2448.52 2585,2505.72 v1(2585,2510)
  Bottom Layer w10: v1(2585,2510) 2583.28,2510 2591.78,2501.5 2715.91,2501.5 2932.92,2284.5 J2.2@3104.96,2284.5
PB11: J2.1 U1.80 | length 680.8
  Top Layer w10: U1.80@2547.48,2405.91 2547.48,2374 2548,2374 2548,2310 v1(2561,2297)
  Bottom Layer w10: v1(2561,2297) 2566.5,2297 2566.5,2290.5 2837.5,2290.5 2865.5,2262.5 2946,2262.5 2955.5,2253 J2.1@3104.96,2253
PC10: J1.40 U1.139 | length 731.6
  Top Layer w10: v1(2410.28,2868) 2509.87,2967.59 2509.87,3249.91 2586.85,3326.89 U1.139@2586.85,3415
  Bottom Layer w10: J1.40@2305,2882.92 2338.08,2882.92 2352.67,2868.33 2409.95,2868.33 v1(2410.28,2868)
PC12: J1.38 U1.141 | length 634.5
  Top Layer w10: v1(2435,2965) 2435,2981.99 2477.87,3024.86 2477.87,3275.65 2547.48,3345.26 U1.141@2547.48,3415
  Bottom Layer w10: J1.38@2305,2945.91 2398.92,2945.91 2418.01,2965 v1(2435,2965)
PD2: J1.37 U1.144 | length 573.8
  Top Layer w10: v1(2379.65,2977.41) 2419.81,3017.57 2447.95,3017.57 2461.87,3031.49 2461.87,3289.9 2488.42,3316.46 U1.144@2488.42,3415
  Bottom Layer w10: J1.37@2305,2977.41 v1(2379.65,2977.41)
PE2: J1.20 U1.1 | length 890
  Top Layer w10: v1(1681.23,3325.9) 1695.4,3325.9 1703.18,3333.68 U1.1@1777.18,3333.68
  Bottom Layer w10: v1(1681.23,3325.9) 1681.23,3110.53 1788.5,3003.27 1788.5,2960 1799,2949.5 1865,2949.5 1889,2925.5 1961,2925.5 2040,2846.5 2115.03,2846.5 J1.20@2119.96,2851.43
PE3: J1.19 U1.2 | length 753.4
  Top Layer w10: U1.2@1777.18,3314 1838.81,3314 1862.19,3290.62 1900.41,3290.62 1945.5,3245.53 1945.5,3042.5 1979.37,3008.63 v1(1979.37,2860)
  Bottom Layer w10: v1(1979.37,2860) 2003.87,2860 2043.94,2819.93 J1.19@2119.96,2819.93
PE4: J1.18 U1.3 | length 932.3
  Top Layer w10: v1(1650,3290) 1650.63,3290.63 1773.5,3290.63 U1.3@1777.18,3294.31
  Bottom Layer w10: v1(1650,3290) 1650,3119.14 1772.38,2996.76 1772.38,2953.12 1792,2933.5 1826.5,2933.5 1927.5,2832.5 2008.75,2832.5 2052.81,2788.43 J1.18@2119.96,2788.43
PE5: J1.17 U1.4 | length 779
  Top Layer w10: U1.4@1777.18,3274.63 1838.68,3274.63 ; 1838.69,3274.62 1880,3274.62 1929.5,3225.13 1929.5,3011.59 1955.87,2985.22 1955.87,2820.13 v1(1976,2800)
  Bottom Layer w10: v1(1976,2800) 1981.89,2800 2024.95,2756.94 J1.17@2119.96,2756.94
PE6: J1.16 U1.5 | length 1212.1
  Top Layer w10: v1(1711,3255) 1711.06,3254.94 U1.5@1777.18,3254.94
  Bottom Layer w10: v1(1711,3255) 1711,3329.37 1690.97,3349.4 1644.4,3349.4 1581.9,3286.9 1581.9,3102.11 1640.51,3043.5 1700.16,3043.5 1755.56,2988.1 1755.56,2937.94 1776,2917.5 1812.5,2917.5 1965.8,2764.2 1995.06,2764.2 2033.82,2725.44 J1.16@2119.96,2725.44
PF6: U1.24 U6.7 | length 1937.3
  Top Layer w10: U6.7@1456.5,4385 1517,4385 1568,4334 1568,4175 1394.32,4001.32 1394.32,3328 1435.32,3287 1506,3287 1529,3264 1529,3079 1557.5,3050.5 1557.5,2964.57 1641.14,2880.93 U1.24@1777.18,2880.93
PF7: U1.25 U6.3 | length 2207.1
  Top Layer w10: U6.3@1143.5,4335 1184,4335 1220,4299 1220,4262 1380,4262 1427,4309 1480,4309 1488,4301 1488,4218 1378,4108 1378,3101 1402,3077 1488,3077 1541.5,3023.5 1541.5,2948.57 1628.83,2861.24 U1.25@1777.18,2861.24
PF8: U1.26 U6.5 | length 1817
  Top Layer w10: U6.5@1456.5,4285 1434.28,4285 1357,4207.72 1357,3094.6 1390.6,3061 1478,3061 1525.5,3013.5 1525.5,2932.54 1616.49,2841.56 U1.26@1777.18,2841.56
PF9: U1.27 U6.2 | length 2075
  Top Layer w10: U6.2@1143.5,4385 1120,4385 1112.82,4377.82 1112.82,4321.59 1122.4,4312 1181,4312 1188,4305 1188,4097 1287,3998 1287,3130 1375,3042 1474.37,3042 1509.5,3006.87 1509.5,2888.74 1576.37,2821.87 U1.27@1777.18,2821.87
PG3: J3.37 U1.107 | length 3565
  Top Layer w9.84: J3.37@4415.28,4255 4415.28,4305.75 4454.52,4345
  Top Layer w10: U1.107@2786.28,2841.56 2882.56,2841.56 3008,2967 3057,2967 3249,2775 v1(3379,2775) ; 4454.52,4345 v1(4482.33,4345)
  Bottom Layer w10: v1(3379,2775) 3427.5,2823.5 4390.5,2823.5 4460,2893 4460,3413.19 4621.81,3575.01 4621.81,3766.19 4546,3842 4546,4277 4482.33,4340.67 v1(4482.33,4345)
PG13: J1.33 U1.156 | length 425.3
  Top Layer w10: U1.156@2252.2,3415 2252.2,3362 2328,3286.2 2328,3235.65 2331,3232.65 2331,3142.31 v1(2369.91,3103.39)
  Bottom Layer w10: J1.33@2305,3103.39 v1(2369.91,3103.39)
PG14: J1.32 U1.157 | length 589.3
  Top Layer w10: U1.157@2232.52,3415 2232.52,3356.48 2312,3277 2312,3219.65 2315,3216.65 2315,3109.43 2344.54,3079.89 2379.65,3079.89 2395.48,3095.73 v1(2395.48,3149.48)
  Bottom Layer w10: J1.32@2305,3134.89 2338.42,3134.89 2353.01,3149.48 v1(2395.48,3149.48)
PH6: J2.8 J3.38 U1.83 | length 4382.1
  Top Layer w9: 4435,4134 J3.38@4434.96,4255
  Top Layer w10: U1.83@2606.53,2405.91 2606.53,2460.03 v1(2622,2475.5) ; v1(4435,4095) 4435,4134
  Bottom Layer w10: v1(2622,2475.5) 2586.27,2475.5 2561.5,2500.27 2561.5,2538.86 2602.64,2580 2768,2580 ; J2.8@3104.96,2473.47 3052.47,2473.47 2989,2410 2938,2410 2768,2580 ; v1(4435,4095) 4435,3907 4605.81,3736.19 4605.81,3595.22 4338.59,3328 3155,3328 3134,3307 2850.18,3307 2663.18,3120 2633.77,3120 2580,3066.23 2580,2768 2768,2580
PH7: J3.39 U1.84 | length 6082.7
  Top Layer w9.84: J3.39@4454.65,4255 v1(4454.65,4312)
  Top Layer w10: U1.84@2626.22,2405.91 2626.22,2369.78 2640.89,2355.11 2648.28,2355.11 2667.39,2336 2667.39,2306.5 2713,2260.89 2713,2157 2876,1994 v1(2876,1564)
  Bottom Layer w10: v1(2876,1564) 2876,1510.77 2900.27,1486.5 4523.5,1486.5 4744,1707 4744,4185 4482,4447 4448,4447 4408,4407 4408,4358.65 v1(4454.65,4312)
PI3: J3.36 U1.134 | length 2485
  Top Layer w9.84: v1(4361,4193.5) 4391.75,4224.25 4391.75,4251.16 J3.36@4395.59,4255
  Top Layer w10: U1.134@2685.27,3415 2685.27,3501.76 2782,3598.48 2782,4033 v1(3070,4321)
  Bottom Layer w10: v1(3070,4321) 3075.5,4315.5 4085.5,4315.5 4147.5,4253.5 4301,4253.5 v1(4361,4193.5)
PI8: J3.35 U1.7 | length 4539.8
  Top Layer w9.84: J3.35@4375.91,4255 4375.91,4345
  Top Layer w10: v1(1558,3305) 1594,3305 1683.43,3215.57 U1.7@1777.18,3215.57 ; v1(1625,3401) 1746,3522 1746,4314 2109,4677 4345,4677 4391,4631 4391,4360.09 4375.91,4345
  Bottom Layer w10: v1(1558,3305) 1558,3325 1625,3392 v1(1625,3401)
RESET: C12.1 J1.10 J3.40 P1.5 R6.1 RST.1 U1.31 | length 11194.6
  Top Layer w9.84: J3.40@4474.33,4255 4474.33,4195.74 v1(4476.57,4193.5) ; v1@4482.33,4193.83 4502.83,4193.83 4502.5,4193.5 ; 4502.83,4193.5 4803.59,3892.74 ; 4662.59,4032.92 4803.59,3891.92 4803.59,3866.47
  Top Layer w10: v1(1686.4,2740.57) 1774.62,2740.57 U1.31@1777.18,2743.13 ; v1(1746,1960) 1746,1404 2480,670 3976,670 4010,704 4010,1020 C12.1@4335,1020 ; RST.1@4295,730 4335,770 C12.1@4335,1020 ; 4803.59,3866.47 4803.59,1560 4335,1091.41 C12.1@4335,1020
  Bottom Layer w10: v1(1746,1960) 1620,2086 1620,2647 1686.4,2713.4 v1(1686.4,2740.57) 1713.57,2740.57 1724.24,2751.24 1891.96,2751.24 1939.2,2704 1961.32,2704 2015.98,2649.34 2015.98,2594 2073.52,2536.46 J1.10@2119.96,2536.46 ; P1.5@2860,4470 2932.5,4542.5 3329.22,4542.5 3367.96,4503.75 4221.25,4503.75 4327.5,4397.5 4327.5,4368.83 4476.57,4219.76 v1(4476.57,4193.5)
VBAT: D1.2 J1.29 | length 1951.4
  Top Layer w20: D1.2@903.74,3582.6 903.74,3492.26 v1(904,3492)
  Bottom Layer w10: 1887.33,3038.41 1887.33,3047.85 1861.5,3073.68 1861.5,3101.55 1902.95,3143
  Bottom Layer w11.81: 1902.95,3143 2069,3143 2077.11,3134.89 J1.29@2119.96,3134.89
  Bottom Layer w20: v1(904,3492) 1765,3492 1783,3474 1783,3098 1809.5,3071.5 1809.5,2997.35 1829.85,2977 1861.35,2977 1889,3004.66 1889,3036.74 1887.33,3038.41
VCC3.3: 3.3V.1 C31.2 C32.2 C37.2 C38.2 C39.2 C40.2 C41.2 C42.2 C43.2 C44.1 C45.1 MOS1.2 P1.4 R6.2 R8.1 R9.1 R16.2 R17.1 R18.2 R19.1 R20.2 R21.2 U2.5 U3.1 U3.3 U3.9 U3.14 U3.27 U3.43 U3.49 U5.8 U6.8 WKUP.2 | length 2181.2
  Top Layer w10: U6.8@1456.5,4435 v1(1510,4435) ; v1(3780,2623.5) 3780,2580 3787.56,2572.44 U3.27@3806.02,2572.44 ; U3.14@4215.47,2572.44 4215.47,2627.74 ; 4467.44,2047.26 U3.49@4467.44,2100
  Top Layer w15: v1(4560,2709.53) U3.3@4561.93,2587.44 ; U3.1@4624.92,2572.44 4624.92,2550 4632.09,2542.84 v1@4652.84,2542.84
  Top Layer w15.75: U3.43@4278.46,2100 4278.46,2051.75 4318.37,2011.84 ; U3.9@4372.95,2572.44 4372.95,2622.08 v1(4395.47,2644.6)
  Top Layer w20: 3.3V.1@895,3150 v1(895,3191.12) ; v1(965,3930) 1035.06,3930 R9.1@1050,3944.94 ; v1(965,4060) R8.1@1050,4060 ; C44.1@1605,4435 v1(1605,4515) ; U2.5@1870,1157.4 v1(1912.5,1157.4) ; v1(1904.94,4102.5) R21.2@1904.94,4150 ; C31.2@1925,735 v1(2000,735) ; v1(2085,780) C32.2@2085,850 ; v1(2197.5,4175.06) R20.2@2245,4175.06 ; U5.8@2299.41,4500 v1(2349.41,4500) ; MOS1.2@2422.6,1079.21 2430,1086.61 v1(2430,1136.85) ; C45.1@2479.94,4450 v1(2479.94,4497.5) ; v1(3565,3427.5) R18.2@3565,3475 ; C37.2@3760.06,1880 v1(3760.06,1927.5) ; v1(3877.5,1015) R6.2@3925,1015 ; v1(3890,1925) 3895,1920 3925,1920 C38.2@3925,1885 ; v1(4064,1953.5) 4064,1920.5 4080,1904.5 C39.2@4080,1890 ; WKUP.2@4140,720 v1(4200,720) ; v1(4140,3262.5) R17.1@4140,3310 ; v1(4189.64,2672) 4215.47,2646.17 4215.47,2627.74 ; C40.2@4230,1890 4230.97,1890.97 v1(4230.97,1948) ; R19.1@4270,2750.06 4301.5,2750.06 v1(4317.5,2766.06) ; C41.2@4396.97,1890 v1(4396.97,1937.5) ; 4467.44,2047.26 4485.47,2029.22 v1(4485.47,2011.84) ; C42.2@4554.45,1890 4555,1890.55 v1(4555,1943.5) ; v1(4560,2709.53) v1@4561.93,2707.6 ; v1(4582.5,3410) R16.2@4630,3410 ; v1@4652.84,2542.84 v1(4660,2542.84) ; C43.2@4700,1875 4715,1890 v1(4715,1955)
  other v1: 4305.47,2011.84
VCC3.3M: C13.2 C14.2 C15.2 C16.2 C17.2 C18.2 C19.2 C20.2 C21.2 C22.2 C23.2 C24.2 C25.2 C26.2 C27.2 D1.1 R3.2 R5.2 R8.2 R9.2 U1.15 U1.23 U1.36 U1.49 U1.62 U1.72 U1.82 U1.91 U1.103 U1.114 U1.127 U1.136 U1.149 U1.159 U1.172 | length 3716.8
  Top Layer w10: 1711.91,3042 1728,3058.09 U1.15@1777.18,3058.09 1848.41,3058.09 1887.33,3019.17 ; 1730.54,2904.07 1734,2900.61 U1.23@1777.18,2900.61 ; U1.36@1777.18,2644.71 1858.41,2644.71 1862.22,2640.89 1863.72,2640.89 1887.61,2617 v1(1914,2617) ; 1906,2330.76 1913.72,2338.47 1932.62,2338.47 1932.62,2357.38 1937.24,2362 U1.49@1937.24,2405.91 ; v1(1930,3490) 1930.11,3490 1937.24,3482.87 U1.172@1937.24,3442.24 ; 2173,2260 2173,2341.85 2193.15,2362 U1.62@2193.15,2405.91 ; U1.159@2193.15,3415 2193.15,3360 2262.13,3291.02 ; v1(2382.5,3335) 2382.5,3344.5 2390,3352 U1.149@2390,3415 ; U1.72@2390,2405.91 2390,2440 2411,2461 2410.05,2461 2440,2490.95 v1(2440,2507) ; U1.82@2586.85,2405.91 2586.85,2365.65 2600,2352.5 2613.5,2352.5 v1(2636,2330) ; 2628,3344 2628,3358.19 2645.9,3376.1 U1.136@2645.9,3415 ; v1(2684.66,2605.34) 2684.66,2587.79 2745.85,2526.6 U1.91@2765,2526.6 ; 2690,2960 2705.16,2975.16 2728.73,2975.16 2732.93,2979.35 U1.114@2786.28,2979.35 ; U1.103@2786.28,2762.82 2894.57,2762.82 v1(2914.25,2743.13) ; U1.127@2786.28,3235.26 2956.37,3235.26
  Top Layer w20: D1.1@903.74,3657.4 903.74,3684.88 915,3696.14 v1(915,3720) ; R3.2@1110,2445 v1(1110,2492.5) ; R9.2@1140,3944.94 1155.06,3944.94 1189.37,3910.63 v1(1205,3910.63) ; R8.2@1140,4060 v1(1187.5,4060) ; C15.2@1540,2660 1571.5,2660 v1(1587.5,2644) ; C14.2@1570,3114.94 v1(1617.5,3114.94) ; C13.2@1570,3240 v1(1617.5,3240) ; 1711.91,3042 1686.69,3042 1619.5,2974.8 1619.5,2951.2 1666.62,2904.07 1730.54,2904.07 ; R5.2@1825,3675 1825,3643.5 v1(1841,3627.5) ; 1887.33,3019.17 1887.33,2991.67 1914,2965 v1(1914,2949) ; v1(1906,2244) 1906,2330.76 ; C27.2@2035,1570 2035,1608 2044.5,1617.5 v1(2051,1617.5) ; C16.2@2095,2039.94 2107,2039.94 2139,2071.94 v1(2142.5,2071.94) ; v1(2143,2040) 2143,2230 2145.93,2232.93 2160,2232.93 2172.69,2245.63 2172.69,2259.69 2173,2260 ; 2262.13,3291.02 2271.89,3281.26 v1(2271.89,3205) ; C17.2@2340,1910 2340,1929.1 2370.9,1960 v1(2390.94,1960) ; v1(2628,3328) 2628,3344 ; C18.2@2645,2115 v1(2645,2178) ; v1(2670,2940) 2690,2960 ; C19.2@2705,1740 2719.9,1754.9 2705,1769.8 v1(2705,1800) ; 2956.37,3235.26 2972.37,3219.26 2976.49,3219.26 v1(2992.74,3203) ; v1(3037.5,3880.06) C25.2@3085,3880.06 ; v1(3050,3655) C24.2@3100,3655 ; v1(3067.5,3470) C23.2@3115,3470 ; v1(3532.5,2750) C21.2@3580,2750 ; v1(3537.5,2930.58) C20.2@3585,2930.58 ; v1(3537.5,3079) 3553.5,3095 C22.2@3585,3095
  other v1: 3930,3130
VCC5: 5V.1 C33.1 F1.1 J1.58 J1.59 J1.60 J3.2 USB.1 | length 668.5
  Top Layer w9.84: J3.2@3726.3,4255 3726.3,4348.3
  Top Layer w15: USB.1@989,1071.18 1046.18,1071.18
  Top Layer w20: v1(910,2725) 5V.1@910,2785 ; 1046.18,1071.18 1075.19,1100.19 v1(1075.19,1110) ; C33.1@1105,1320 v1(1173.4,1320) ; F1.1@1153.23,1090 v1(1153.23,1174.43) ; 3726.3,4348.3 3789.17,4411.17 v1(3789.17,4435.97)
  Bottom Layer w10: J1.60@2335,2253 2341.88,2253 2343.56,2251.32 v1(2343.56,2232.93)
  Bottom Layer w11.81: J1.58@2305,2315.99 2319.81,2315.99 2316.11,2315.99 2316.05,2283.23 2315.12,2275.17 2322.01,2266.5 2343.56,2244.95 v1(2343.56,2232.93)
VCC_LED: C34.1 MOS1.3 R10.1 R15.2 | length 2055.9
  Top Layer w20: v1(2455,925) 2455,975.79 MOS1.3@2460,980.79 ; v1(2594,1155) R15.2@2850,1155 2850,1280 2910,1340 R10.1@3064.94,1340 3064.94,1522.5 3054.18,1533.26 3054.18,2368 C34.1@2997,2368
  Bottom Layer w20: v1(2455,925) 2455,1016 v1(2594,1155)
VDDA: C6.2 C7.2 R2.2 R3.1 U1.39 | length 900.4
  Top Layer w10: 1485,2343 1485,2349.23 1721.42,2585.65 U1.39@1777.18,2585.65
  Top Layer w20: v1(1110,2307.5) R3.1@1110,2355 ; R2.2@1285,2305 1285,2344 1293.5,2352.5 v1(1301,2352.5) ; 1485,2343 C7.2@1485,2040 v1(1532.5,2040) ; C6.2@1490,1880 v1(1537.5,1880)
VREF+: J1.2 R13.1 | length 1332.8
  Top Layer w20: v1(2069,2268.5) 2069,2202.5 1929,2062.5 1929,1888 2462,1355 R13.1@2545,1355
  Bottom Layer w11.81: v1(2069,2268.5) 2085,2284.5 J1.2@2119.96,2284.5
pads on no net: J1.11 J1.12 J1.13 J1.14 J1.48 J1.49 J1.50 J1.51 J1.52 J1.53 J1.54 J2.4 J2.5 J2.6 J2.7 J2.9 J2.10 J2.11 J2.12 J2.13 J2.14 J2.15 J2.21 J2.22 J2.23 J2.26 J2.27 J2.28 J2.29 J2.30 J2.32 J2.33 J2.34 J2.35 J2.36 J2.37 J2.38 J2.39 J2.40 J2.41 J2.42 J2.43 J2.44 J2.45 J2.46 J2.47 J2.48 J2.49 J2.50 J2.51 J2.52 J2.53 J2.54 J2.55 J2.56 J2.57 J2.58 J2.59 J2.60 U1.53 U1.54 U1.55 U1.92 U1.93 U1.94 U1.95 U1.101 U3.40 U4.1 U4.2 U4.3 U4.4 U4.5 U4.6 U4.10 U4.11 U4.14 U4.15 U4.20 U4.21 U4.22 U4.23 U4.24 U4.25 U4.26 U4.27 U4.28 U4.33 U4.34 U4.35 U4.38 U4.39 U4.40 U4.45 U4.46 U4.47 U4.48 U6.9 USB.4

## Polygon pours and split planes (outlines as drawn)
no net on Top Layer "Top Layer-No Net 1" (solid, pour order 18): 2330,5740
no net on Top Layer "Top Layer-No Net" (solid, pour order 12): 520,2200
GND on GND (split plane): 4924.9,630.1 795.07,630.1 790.12,4684.9 4924.9,4684.9
VCC3.3 on PWR (split plane): 321 vertices, not listed, extent 794.9,630.1 4924.9,4684.9
VCC5 on PWR (split plane): 3494.9,4510.1 3492.95,4509.71 3491.3,4508.6 3490.19,4506.95 3489.8,4505 3490.19,4503.05 3491.3,4501.4 3492.95,4500.29 3494.9,4499.9 4667.89,4499.9 4689.9,4477.89 4689.9,4157.11 4677.89,4145.1 3566.66,4145.1 3564.71,4144.71 3563.06,4143.6 3561.95,4141.95 3561.65,4140.46 3426.95,4275.16 3427.21,4275.55 3427.6,4277.5 3427.21,4279.45 3426.1,4281.1 3425.1,4282.11 3425.1,4510.1 3424.71,4512.05 3423.6,4513.7 3278.7,4658.6 3277.05,4659.71 3275.1,4660.1 845.58,4660.1 843.63,4659.71 841.98,4658.6 824.4,4641.02 823.29,4639.37 822.9,4637.42 822.9,2840 823.29,2838.05 824.4,2836.4 826.05,2835.29 828,2834.9 972.89,2834.9 985,2822.79 985,2682.21 856.4,2553.6 855.29,2551.95 854.9,2550 854.9,1460 855.29,1458.05 856.4,1456.4 889.45,1423.35 891.1,1422.24 893.05,1421.85 1286.95,1421.85 1288.9,1422.24 1290.55,1423.35 1291.66,1425 1292.01,1426.75 1783.6,1918.35 1784.71,1920 1785.1,1921.95 1785.1,2172.89 1822.11,2209.9 2165,2209.9 2166.95,2210.29 2168.6,2211.4 2230.2,2272.99 2231.3,2274.64 2231.69,2276.59 2231.69,2324.9 2407.89,2324.9 2409.9,2322.89 2409.9,2222.11 2392.89,2205.1 2205,2205.1 2203.05,2204.71 2201.4,2203.6 2162.89,2165.1 1890,2165.1 1888.05,2164.71 1886.4,2163.6 1885.29,2161.95 1885.15,2161.25 1884.45,2161.11 1882.79,2160 1881.69,2158.35 1881.3,2156.4 1881.3,2003.51 1846.49,1968.7 1845.39,1967.05 1845,1965.1 1843.05,1964.71 1841.4,1963.6 1840.29,1961.95 1840.15,1961.25 1839.45,1961.11 1837.79,1960 1836.69,1958.35 1836.3,1956.4 1836.3,1828.51 1396.4,1388.6 1395.29,1386.95 1394.9,1385 1394.9,987.11 1387.89,980.1 1211.33,980.1 1209.38,979.71 1207.73,978.6 1014.22,785.1 794.88,785.1 790.12,4684.9 3494.9,4684.9
VCC3.3 on PWR (split plane): 3604.9,1715 3605.29,1713.05 3606.4,1711.4 3651.4,1666.4 3651.99,1666 3651.85,1665.29 3651.85,1078.05 3652.24,1076.1 3653.35,1074.45 3739.9,987.89 3739.9,780.68 2382.05,780.68 2382.05,974.84 2432.11,1024.9 2461.95,1024.9 2463.9,1025.29 2465.56,1026.4 2466.66,1028.05 2467.05,1030 2467.05,1134.74 2483.31,1151.01 2484.42,1152.66 2484.81,1154.61 2484.81,1255.29 2484.42,1257.24 2483.31,1258.89 2420.1,1322.11 2420.1,1707.89 2423.6,1711.4 2424.71,1713.05 2425.1,1715 2425.1,1929.9 2532.89,1929.9 2541.4,1921.4 2543.05,1920.29 2545,1919.9 2587.89,1919.9 2604.9,1902.89 2604.9,1575 2605.29,1573.05 2606.4,1571.4 2631.4,1546.4 2633.05,1545.29 2635,1544.9 2790,1544.9 2791.95,1545.29 2793.6,1546.4 2823.6,1576.4 2824.71,1578.05 2825.1,1580 2825.1,1875 2824.71,1876.95 2823.6,1878.6 2730.1,1972.11 2730.1,2242.89 2873.6,2386.4 2874.71,2388.05 2875.1,2390 2875.1,2499.9 3197.89,2499.9 3296.4,2401.4 3298.05,2400.29 3300,2399.9 3485,2399.9 3486.95,2400.29 3488.6,2401.4 3604.9,2517.69
VDDA on PWR (split plane): 1374.9,2337.89 1374.9,2165 1375.29,2163.05 1376.4,2161.4 1411.4,2126.4 1413.05,2125.29 1415,2124.9 1542.89,2124.9 1594.9,2072.89 1594.9,1842.11 1537.89,1785.1 1257.11,1785.1 1125.1,1917.11 1125.1,2130 1124.71,2131.95 1123.6,2133.6 996.1,2261.1 990.1,2267.11 990.1,2394.9 1317.89,2394.9
VCC3.3M on PWR (split plane): 278 vertices, not listed, extent 869.6,1365.1 4087.69,4154.9

## Other copper
GND (plane layer: these items are gaps in the copper):
  rectangle: 785,620 795.07,630.1
  rectangle: 785,620 795.07,630.1
PWR (plane layer: these items are gaps in the copper):
  lines w10: 760,780 1016.33,780 1211.33,975 1390,975 1400,985 1400,1385 1841.4,1826.4 1841.4,1956.4 ; 985,2400 1196.95,2400 1320,2400 1380,2340 1380,2165 1415,2130 1545,2130 1600,2075 1600,1840 1540,1780 1255,1780 1120,1915 1120,2130 992.5,2257.5 ; 1000,2250 985,2265 985,2550 1000,2565 1285,2565 1300,2580 1300,2775 1315,2790 1455,2790 1470,2805 1470,3040 1465,3045 1310,3045 1298.05,3056.95 1298.05,3309.71 ; 1094.9,3875.39 1094.9,4095 1094.9,4139.9 1115,4160 1230,4160 1265.1,4124.9 1265.1,4095 1265.1,4028.7 1353.8,3940 1730,3940 1740,3950 1905,3950 1924.71,3930.29 1924.71,3523.9 2889.71,3523.9 2910,3520 2910.64,3518.13 2910,3970 ; 1094.9,3880 864.5,3880 864.5,3624.71 950,3624.71 950,3720 950,3816.4 988.6,3855 1078.34,3855 1119.9,3855 1720,3855 1730,3845 1730,3545 1645,3460 1645,3305 ; 1200,2405.1 1200,2435 1350,2585 1640,2585 1640,2455 1820,2275 1820,2215 ; 1285,1426.95 1780,1921.95 1780,2175 1820,2215 ; 1286.95,1426.95 893.05,1426.95 860,1460 860,2550 990.1,2680.1 990.1,2824.9 975,2840 828,2840 828,4637.42 845.58,4655 3275.1,4655 3420,4510.1 3420,4280 3422.5,4277.5 ; 1300,3305 1639.9,3305 ; 1845,1960 2155,1960 2180,1935 2255,1935 2250,1930 2250,1810 2165,1725 1925,1725 1915,1715 1915,1400 1955,1360 2105,1360 2170,1425 2170,1625 2255,1710 2415,1710 2420,1715 2420,1935 2503.05,1935 ; 1850.1,1965.1 1886.4,2001.4 1886.4,2156.4 ; 1890,2160 2165,2160 2205,2200 2395,2200 2415,2220 2415,2325 2410,2330 2230.2,2330 ; 2226.59,2333.6 2226.59,2276.59 2165,2215 1820,2215 ; 2415,1712.99 2415,1320 2479.71,1255.29 2479.71,1154.61 2461.95,1136.85 2461.95,1030 2430,1030 2376.95,976.95 2376.95,775.58 3745,775.58 3745,990 3656.95,1078.05 3656.95,1665.29 ; 2495.1,1935 2535,1935 2545,1925 2590,1925 2610,1905 2610,1575 2635,1550 2790,1550 2820,1580 2820,1875 2725,1970 2725,2245 2870,2390 2870,2505 3200,2505 3300,2405 3485,2405 3615.1,2535.1 ; 2911.95,3974.71 2911.95,4011.95 2970,4070 3255,4070 3406.4,3918.6 ; 3187.79,3080 3191.4,3076.4 ; 3402.79,3725 3402.79,3915 ; 3405,3720 3405,3235 3430,3210 ; 3421.25,4273.65 3560,4134.9 3566.66,4134.9 ; 3435.1,3210 4050,3210 4090,3170 4090,2680 4100,2670 3655,2670 3610,2625 3610,1715 3655,1670 ; 3494.9,4505 4670,4505 4695,4480 4695,4155 4680,4140 3566.66,4140 ; 3500,4505 3500,4695

## Silkscreen, mask and mechanical layers (free items; w line width, h text height)
Top Overlay:
  text "RST 3.3 SWD SWC GND" at 2825,4385 h25
  text "ECE477 Group <12>" at 3510,1430 h60
  text "Yining Huang / Yuefan Fu / Zijun Lin / Fangrui Qin" at 920,1390 h60
  text "Mainboard v1.6" at 3655,1320 h50
  text "TXD RXD GND" at 3355,745 h30
Mechanical 1:
  lines w10: 770,615 770,4705 4945,4705 4945,610 775,610 770,615
Mechanical 4:
  lines w10: 770,615 775,610 4945,610 4945,4705 770,4705 770,615

## Text inside footprints (layer, text, board x,y; h text height)
J3: Top Overlay "40" at 4450.61,4192 h40; Top Overlay "1" at 3702.61,4196 h40